# EAGLE board DTMF (EAGLE 6.1)
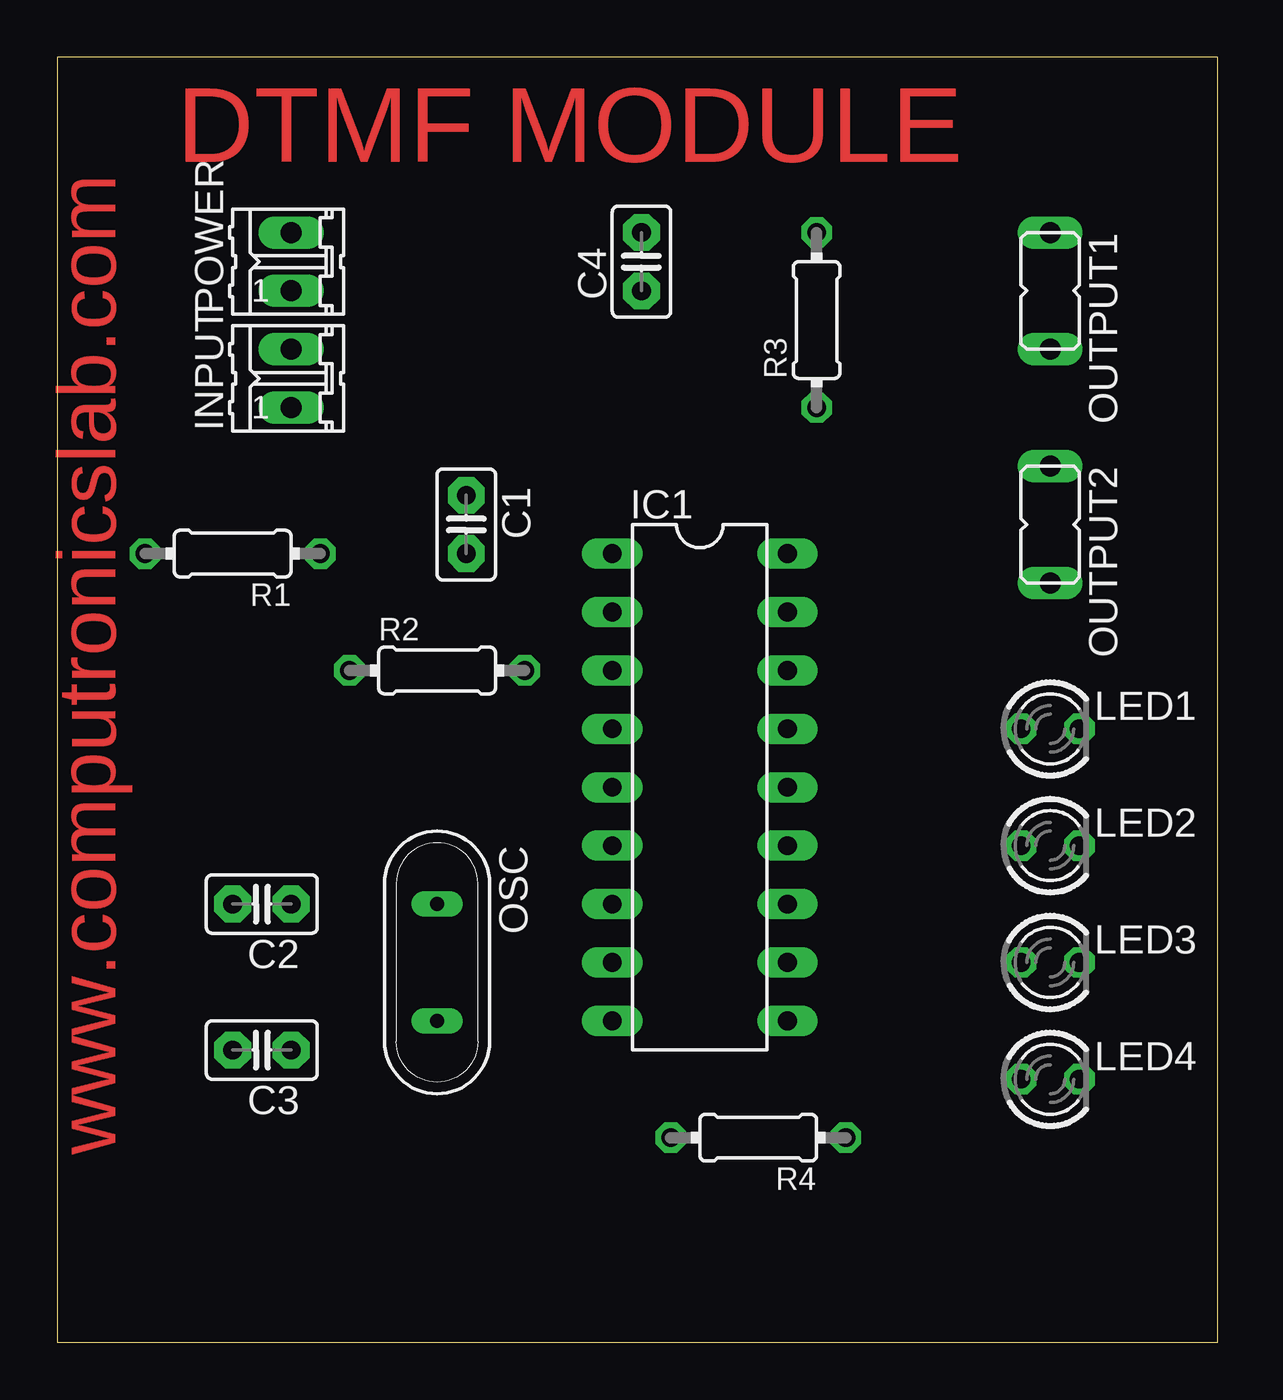
[diagram p0: board, top side]
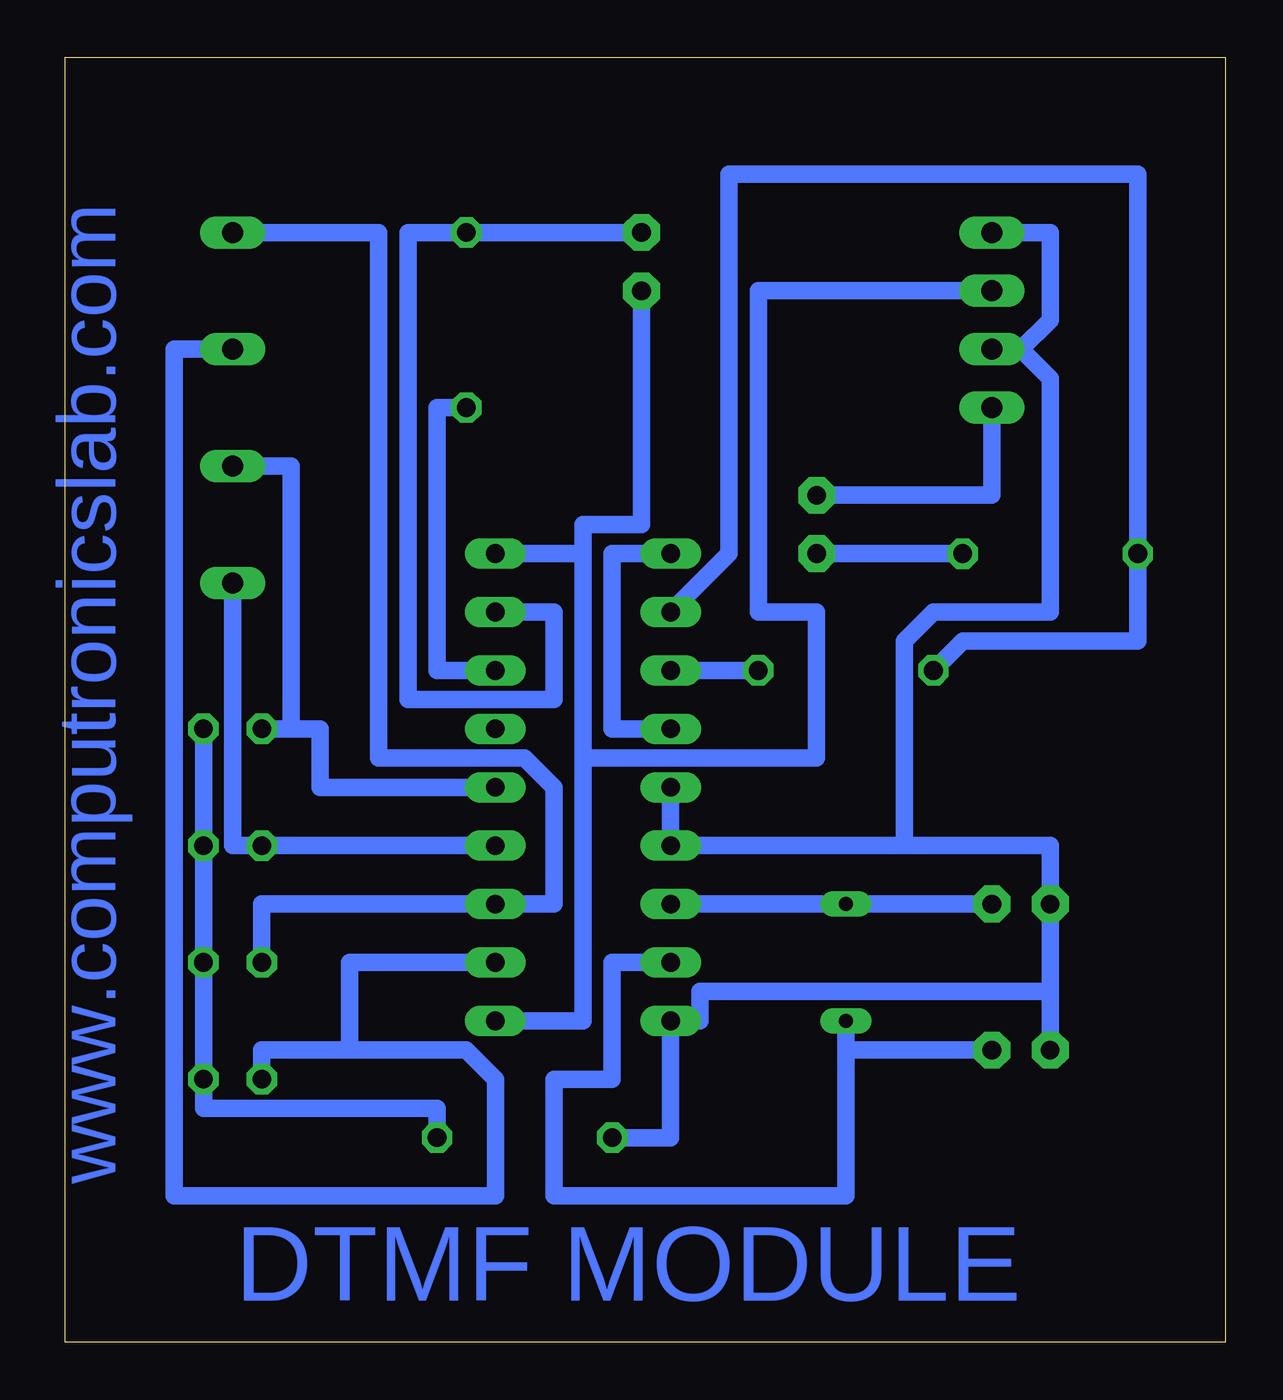
[diagram p1: board, bottom side, seen from below]

Size 50.47 x 55.87 mm. Coordinates in mm from the lower left corner, seen from the top.
Outline: 0,0 50.47,0 50.47,55.87 0,55.87 0,0
Copper layers (1*16): Top 0.035mm / dielectric 1.5mm / Bottom 0.035mm
Design rules: minimum track width 30mil, minimum drill 24mil, track to track 8mil, track to pad 8mil, pad to pad 8mil, via to via 8mil, smd to smd 8mil, copper to edge 40mil, drill to drill 8mil, minimum pad ring 10mil, minimum via ring 8mil, stop-mask expansion 4mil, vias tented up to drill 0mil, thermal gap 10mil

## Footprints (pad centres in the part's own frame; a part is rotated, then mirrored left to right if it is on the bottom)
C2.5-2 = drill 0.813 pad 1.6 octagon: 1 -1.27,0; 2 1.27,0
DIL18 = drill 0.813 long: 1 -10.16,-3.81; 2 -7.62,-3.81; 3 -5.08,-3.81; 4 -2.54,-3.81; 5 0,-3.81; 6 2.54,-3.81; 7 5.08,-3.81; 8 7.62,-3.81; 9 10.16,-3.81; 10 10.16,3.81; 11 7.62,3.81; 12 5.08,3.81; 13 2.54,3.81; 14 0,3.81; 15 -2.54,3.81; 16 -5.08,3.81; 17 -7.62,3.81; 18 -10.16,3.81
02P = drill 0.914 long: 1 -1.27,0; 2 1.27,0
LED3MM = drill 0.813 octagon: A -1.27,0; K 1.27,0
QS = drill 0.61 long: 1 -2.54,0; 2 2.54,0
JP1 = drill 0.914 long: 1 0,-2.54; 2 0,2.54
0204/7 = drill 0.813 octagon: 1 -3.81,0; 2 3.81,0

## Placement (x,y rotation side)
C1  0.1uf  [C2.5-2]  17.78,35.56 270 top
C2  22PF  [C2.5-2]  8.89,19.05 180 top
C3  22PF  [C2.5-2]  8.89,12.7 180 top
C4  0.1UF  [C2.5-2]  25.4,46.99 90 top
IC1  CM8870CP  [DIL18]  27.94,24.13 270 top
INPUT  [02P]  10.16,41.91 90 top
LED1  3mm  [LED3MM]  43.18,26.67 0 top
LED2  3mm  [LED3MM]  43.18,21.59 0 top
LED3  3mm  [LED3MM]  43.18,16.51 0 top
LED4  3mm  [LED3MM]  43.18,11.43 0 top
OSC  3.57  [QS]  16.51,16.51 270 top
OUTPUT1  [JP1]  43.18,45.72 180 top
OUTPUT2  [JP1]  43.18,35.56 180 top
POWER  [02P]  10.16,46.99 90 top
R1  10K  [0204/7]  7.62,34.29 180 top
R2  100K  [0204/7]  16.51,29.21 0 top
R3  100K  [0204/7]  33.02,44.45 90 top
R4  330E  [0204/7]  30.48,8.89 180 top

## Library data of the parts
C1-C4 = capacitor-wima
IC1 = california-micro-devices; OC_FARNELL: unknown; OC_NEWARK: unknown
INPUT POWER = con-amp-quick; OC_FARNELL: unknown; OC_NEWARK: unknown
LED1-LED4 = led
OSC = special
OUTPUT1 OUTPUT2 = jumper
R1-R4 = rcl

## Nets
N$1: C2.2 C3.2 IC1.5 IC1.6 IC1.9 INPUT.2 POWER.2 R4.2
N$2: C1.2 R1.1
N$3: IC1.3 R2.2
N$4: LED1.K LED2.K LED3.K LED4.K R4.1
N$5: IC1.11 LED4.A OUTPUT1.2
N$6: IC1.12 LED3.A OUTPUT1.1
N$7: IC1.13 LED2.A OUTPUT2.2
N$8: IC1.14 LED1.A OUTPUT2.1
N$10: C4.1 IC1.10 IC1.18 POWER.1
N$11: C1.1 INPUT.1
N$12: IC1.2 R1.2 R2.1
N$13: IC1.1 IC1.4
N$14: C2.1 IC1.7 OSC.1
N$15: C3.1 IC1.8 OSC.2
N$17: IC1.16 R3.1
N$24: C4.2 IC1.17 R3.2

## Tracks (layer width: path | path; a pad name or v marks a point on that pad's centre or on a via)
N$1
  Bottom 0.762: R4.2 24.13,8.89 IC1.9 22.86,13.97 22.86,15.24 7.62,15.24 | 8.89,43.18 INPUT.2 8.89,43.18 | 8.89,43.18 7.62,44.45 7.62,48.26 POWER.2 | IC1.5 IC1.6 13.97,21.59 | 7.62,15.24 C2.2 7.62,21.59 10.16,21.59 13.97,21.59 | 7.62,15.24 C3.2 | 8.89,43.18 7.62,41.91 7.62,31.75 12.7,31.75 13.97,30.48 13.97,21.59
N$2
  Bottom 0.762: C1.2 R1.1
N$3
  Bottom 0.762: IC1.3 R2.2
N$4
  Bottom 0.762: LED1.K LED2.K LED3.K LED4.K 44.45,10.16 43.18,10.16 35.56,10.16 34.29,10.16 R4.1
N$5
  Bottom 0.762: 40.64,12.7 38.1,12.7 38.1,16.51 36.83,16.51 IC1.11 | 40.64,12.7 41.91,12.7 LED4.A | OUTPUT1.2 45.72,43.18 45.72,40.64 45.72,7.62 45.72,6.35 31.75,6.35 31.75,8.89 31.75,11.43 33.02,12.7 40.64,12.7
N$6
  Bottom 0.762: LED3.A 41.91,19.05 39.37,19.05 IC1.12 29.21,19.05 29.21,24.13 30.48,25.4 36.83,25.4 36.83,41.91 36.83,48.26 OUTPUT1.1
N$7
  Bottom 0.762: IC1.13 LED2.A 43.18,21.59 OUTPUT2.2
N$8
  Bottom 0.762: IC1.14 39.37,24.13 39.37,26.67 LED1.A 40.64,26.67 40.64,35.56 40.64,38.1 OUTPUT2.1
N$10
  Bottom 0.762: IC1.10 27.94,13.97 27.94,17.78 27.94,25.4 | 27.94,34.29 27.94,25.4 | IC1.18 29.21,34.29 | 29.21,34.29 27.94,34.29 | POWER.1 11.43,45.72 20.32,45.72 20.32,36.83 20.32,31.75 17.78,31.75 17.78,30.48 17.78,25.4 19.05,25.4 27.94,25.4 | C4.1 25.4,35.56 27.94,35.56 27.94,34.29 | 29.21,34.29 27.94,34.29
N$11
  Bottom 0.762: INPUT.1 10.16,38.1 10.16,36.83 13.97,36.83 C1.1
N$12
  Bottom 0.762: R2.1 11.43,30.48 6.35,30.48 3.81,30.48 3.81,31.75 3.81,33.02 R1.2 3.81,46.99 3.81,49.53 3.81,50.8 7.62,50.8 21.59,50.8 21.59,34.29 IC1.2
N$13
  Bottom 0.762: IC1.4 26.67,26.67 26.67,27.94 26.67,29.21 26.67,34.29 IC1.1
N$14
  Bottom 0.762: C2.1 OSC.1 IC1.7
N$15
  Bottom 0.762: C3.1 15.24,12.7 16.51,12.7 16.51,11.43 OSC.2 16.51,7.62 16.51,6.35 26.67,6.35 | 26.67,13.97 26.67,12.7 | 26.67,12.7 26.67,13.97 | 26.67,13.97 26.67,16.51 IC1.8 | 26.67,6.35 29.21,6.35 | 29.21,6.35 29.21,7.62 | 29.21,7.62 29.21,11.43 26.67,11.43 26.67,12.7 | 26.67,12.7 26.67,13.97 | 26.67,6.35 29.21,6.35 | 29.21,6.35 29.21,7.62
N$17
  Bottom 0.762: IC1.16 34.29,29.21 34.29,31.75 34.29,40.64 R3.1
N$24
  Bottom 0.762: IC1.17 29.21,31.75 29.21,29.21 29.21,27.94 33.02,27.94 35.56,27.94 35.56,30.48 35.56,48.26 R3.2 C4.2

## Text on the board
Top: DTMF MODULE | www.computronicslab.com
Bottom: www.computronicslab.com | DTMF MODULE